# Altium PCB TriggerPadPCB.PcbDoc
Units mm, origin at the board's own origin, x right, y up, seen from the top; angles counter-clockwise.
Board outline 23.13 x 24.8 mm, 2 copper layers (Top Layer, Bottom Layer); 3 components, 3 nets, 11 pads, 0 vias.
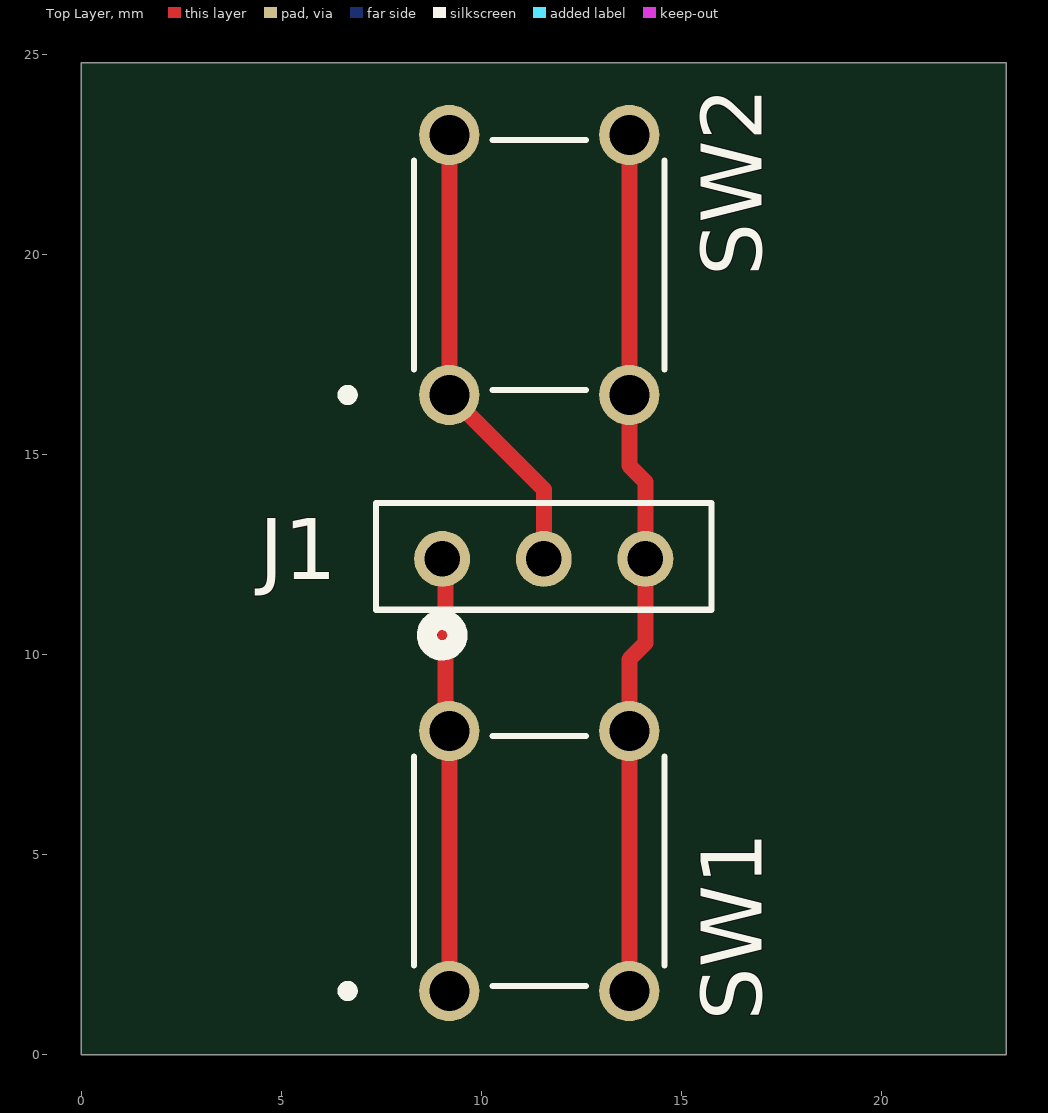
[diagram p0: Top Layer view]
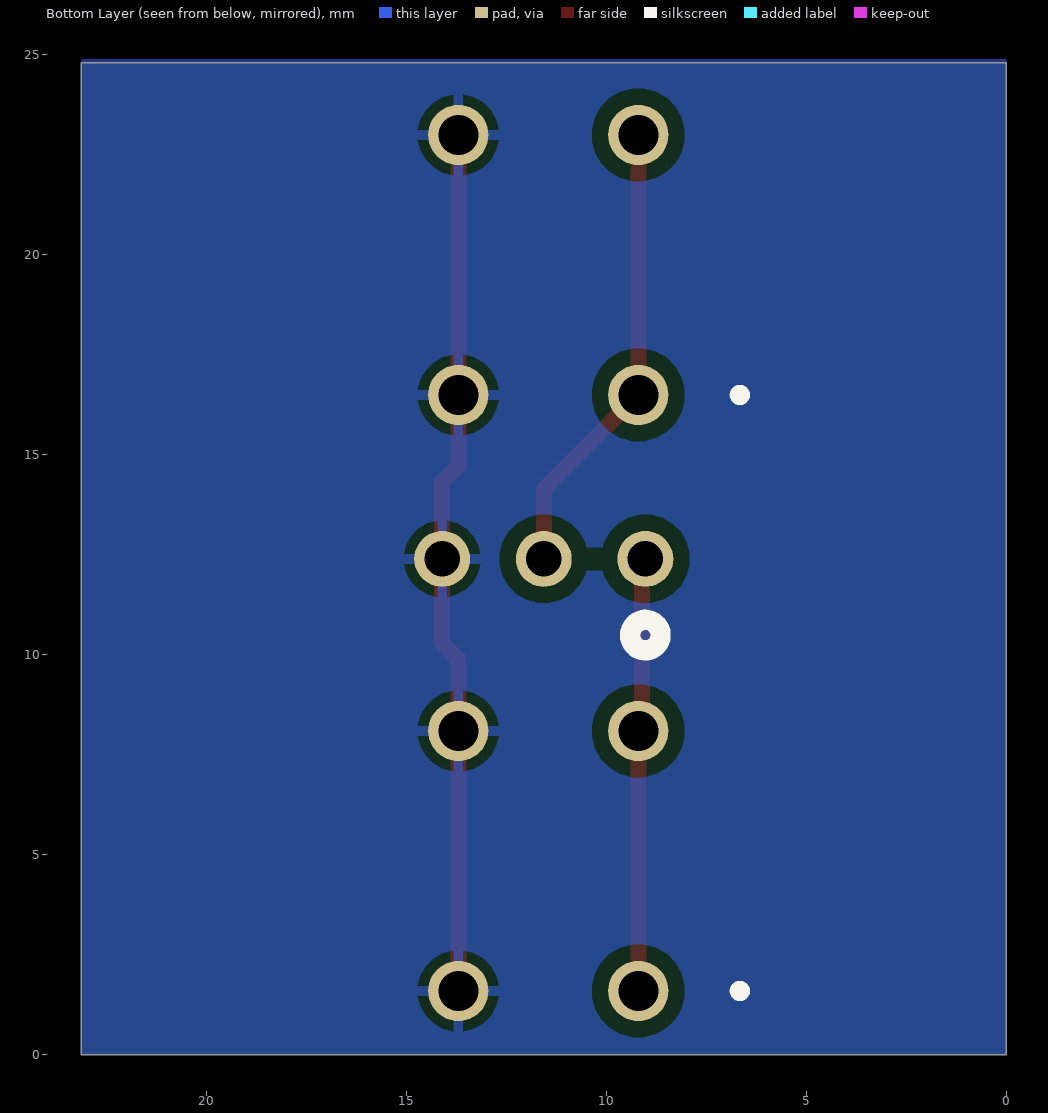
[diagram p1: Bottom Layer view, seen from below]

## Layer stack, top to bottom
Top Solder: solder mask 0.0102, Solder Resist, Dk 3.5
Top Layer: signal copper 0.0356
Dielectric 1: dielectric 0.32, FR-4, Dk 4.8
Bottom Layer: signal copper 0.0356
Bottom Solder: solder mask 0.0102, Solder Resist, Dk 3.5

## Board outline
0,0 23.126,0 23.126,24.8 0,24.8

## Design rules (kind name [scope] priority, off if disabled: settings)
Clearance [All] p1: gap=0.4 ignorepadtopadclearanceinfootprint=FALSE
HoleSize [All] p1: absolutevalues=TRUE maxlimit=10 minlimit=0.4 maxpercent=80.000 minpercent=20.000
PolygonConnect [All] p1: connectstyle=Relief reliefconductorwidth=0.254 reliefentries=4 polygonreliefangle="90 Angle" airgapwidth=0.254
RoutingVias [All] p1: holewidth=0.711 width=1.27 viastyle="Through Hole" minholewidth=0.711 minwidth=1.27 maxholewidth=0.711 maxwidth=1.27
SilkToSilkClearance [All] p1: silktosilkclearance=0.1
SilkToSolderMaskClearance [IsPad] p1: minsilkscreentomaskgap=0.1 clearancetoexposedcopper=TRUE
SolderMaskExpansion [All] p1: expansion=0 istentingtop=FALSE
SupplyNets "Schematic Supply Nets" [InNet('GND')] p1: voltage=0.000
Width [All] p1: maxlimit=10 minlimit=0.4 preferedwidth=0.4
27 further rules are at their usual default settings.

## Classes and differential pairs
component class TriggerPadSchematic: J1

## Components (designator, comment, footprint, x,y, rotation, side; value= is the part's Value field where it differs from the comment)
J1 "TSW-103-22-G-S" CON3_1X3_TU_TSW 11.563,12.4 r0 top
SW1 "B3F-1055" SW_B3F-1050_OMR 9.2,1.6 r90 top
SW2 "B3F-1055" SW_B3F-1050_OMR 9.2,16.5 r90 top

## Footprints (in the part's own frame and the unit in brackets; to place one, negate y for a bottom-side part, rotate by r counter-clockwise, add the part's x,y. Pads: shape width x height; smd on the part's side, far side on the other; paste and mask are expansions set on the pad)
CON3_1X3_TU_TSW [mil]
  round 55 hole 35 paste-99999 mask+0: 1(-100,0) 2(0,0) 3(100,0)
  silkscreen extent -165,-90 165,55, body extent -150,-50 150,50, height 500
SW_B3F-1050_OMR [mm]
  round 1.508 hole 1 paste-2539.97 mask+0: 1(0,0) 2(6.5,0) 3(0,-4.5) 4(6.5,-4.5)
  silkscreen extent -0.13,-5.38 6.38,2.67

## Part data
J1: "No Description Available", Manufacturer_Name="Samtec Inc", Copyright="Copyright (C) 2026 Ultra Librarian. All rights reserved.", Manufacturer_Part_Number=TSW-103-22-G-S, RefDes=RefDes, Type=Type
SW1 SW2: "Description", Manufacturer_Name=Omron, Copyright="Copyright (C) 2025 Ultra Librarian. All rights reserved.", Manufacturer_Part_Number=B3F-1055, RefDes=RefDes, Type=Type

## Nets (pads, with @x,y where several pads share a name; then routed paths per layer and width w, separated by ;. In a path a pad name is that pad's centre, name@x,y a point inside that pad or via, vN(x,y) a via of type N, cw(c..) or ccw(c..) an arc to the next point about the centre after c; other vN are vias at no path point)
A: J1.1 SW1.1 SW1.2 | length 10.9
  Top Layer w0.4: J1.1 9.112,12.311 9.112,8.189 SW1.2 SW1.1
B: J1.2 SW2.1 SW2.2 | length 11.6
  Top Layer w0.4: SW2.2 SW2.1 11.563,14.137 J1.2
GND: J1.3 SW1.3 SW1.4 SW2.3 SW2.4 | length 21.7
  Top Layer w0.4: SW1.3 SW1.4 13.7,9.89 14.103,10.293 J1.3 14.103,14.329 13.7,14.732 SW2.3 SW2.4

## Polygon pours and split planes (outlines as drawn)
GND on Bottom Layer "NONET_L-01_P-001" (solid, pour order 0): 0,24.892 23.114,24.892 23.114,0 0,0